# Allegro board fpga_ccd_2.brd
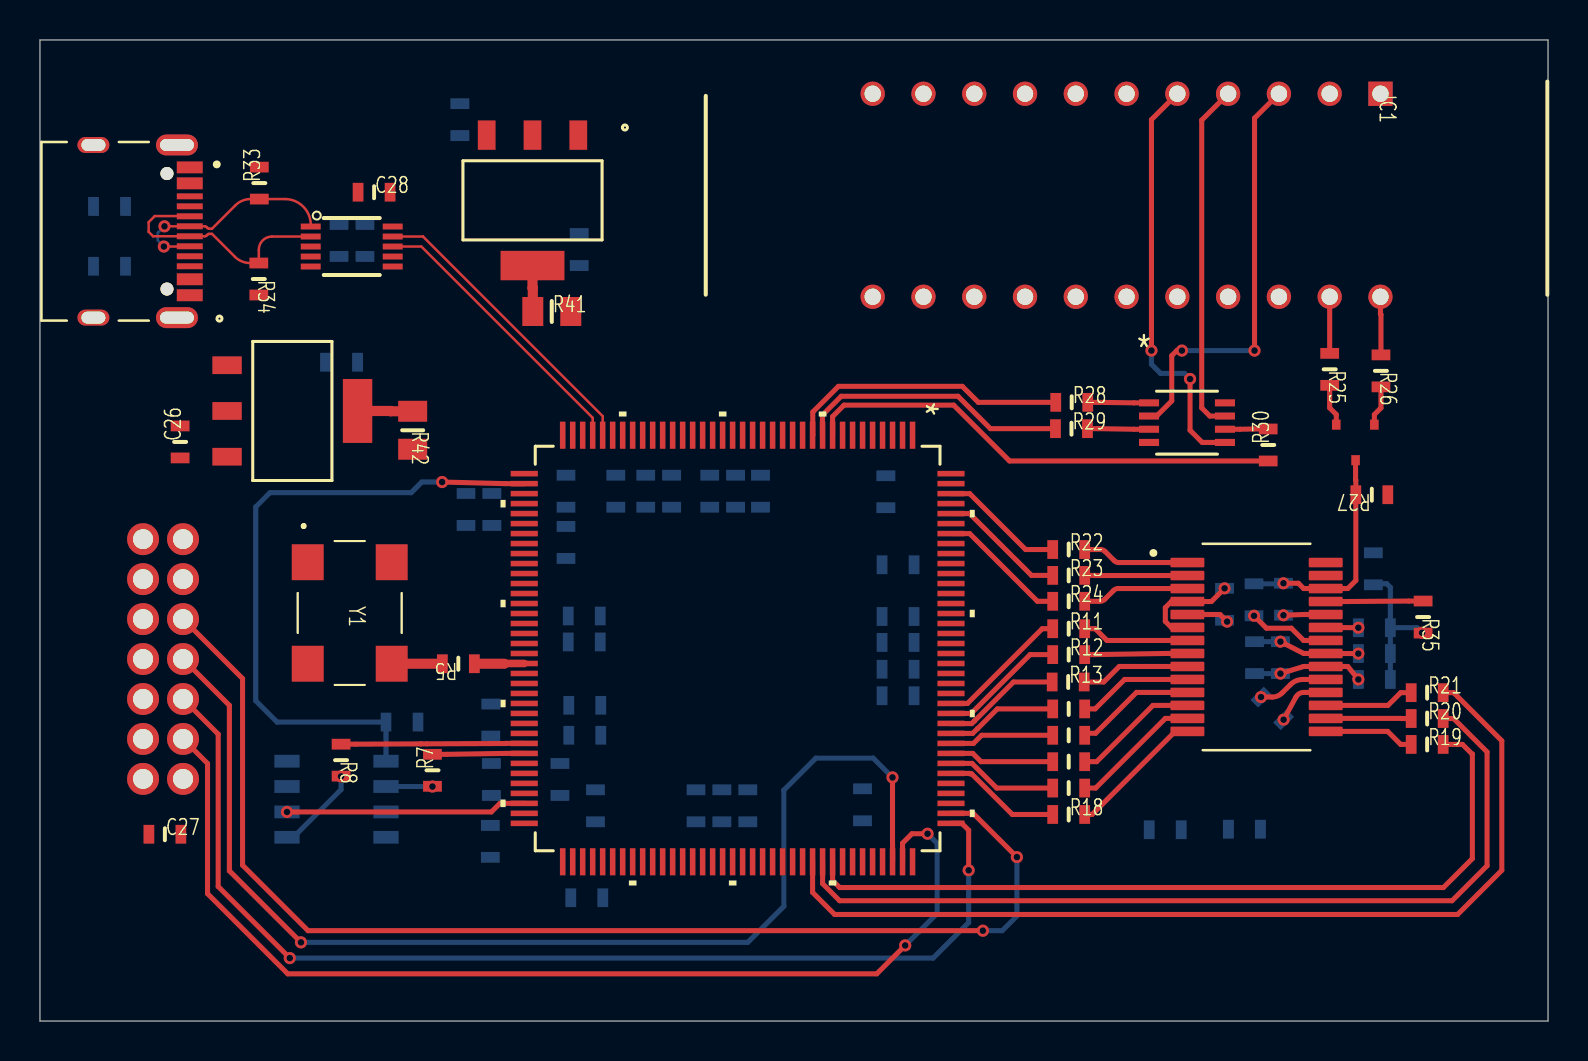
[diagram p0: board, top side]
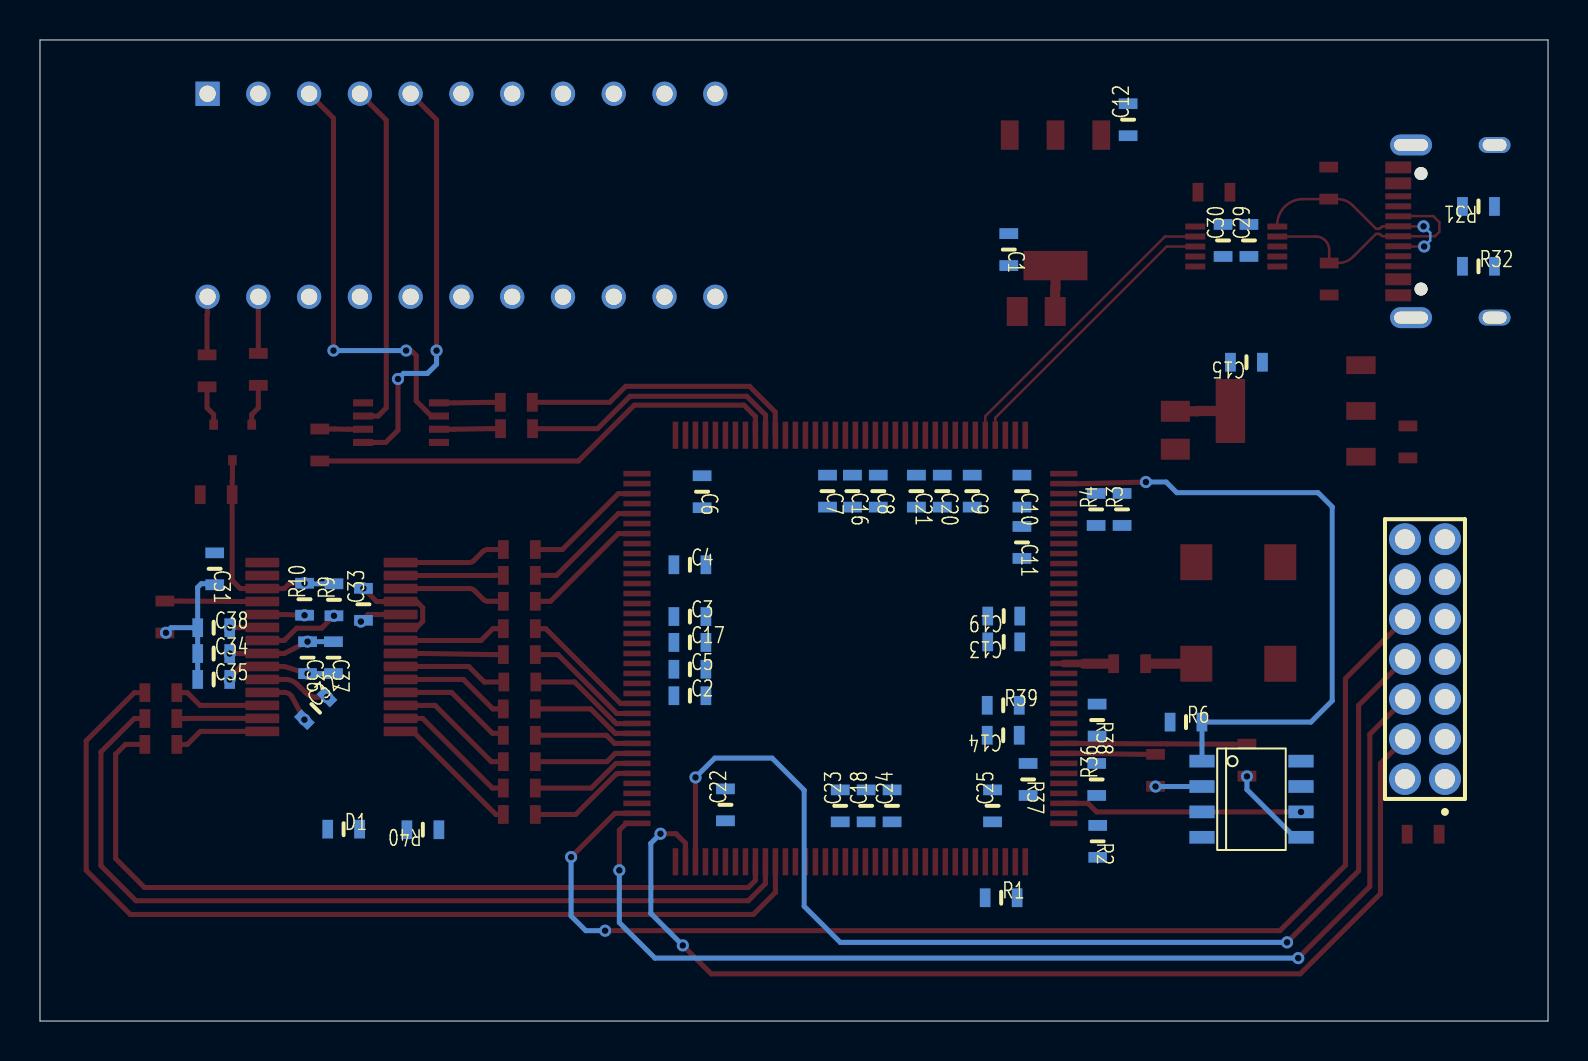
[diagram p1: board, bottom side, seen from below]

Outline 75.44 x 49.1 mm; copper layers: TOP, BOTTOM. Coordinates in mm from the lower left corner of the outline.
Outline path: 0,49.1 0,0 75.44,0 75.44,49.1 0,49.1

## Design rules (mm)
constraint set DEFAULT: min track width 0.127, pair gap 0.127
net group +1.2V: nets +1.2V N30787
net group ADCCLK: nets ADCCLK N43709
net group CCD_ICG: nets CCD_ICG N45930
net group CCD_MASTER: nets CCD_MASTER N46162
net group CCD_SH: nets CCD_SH N46224
net group CDSCLK1: nets CDSCLK1 N43637
net group CDSCLK2: nets CDSCLK2 N43673
net group CLK_50M: nets CLK_50M N10342
net group HT82V38_D0: nets HT82V38_D0 N42823
net group HT82V38_D1: nets HT82V38_D1 N42829
net group HT82V38_D2: nets HT82V38_D2 N42835
net group HT82V38_D3: nets HT82V38_D3 N42817
net group HT82V38_D4: nets HT82V38_D4 N42805
net group HT82V38_D5: nets HT82V38_D5 N42799
net group HT82V38_D6: nets HT82V38_D6 N42811
net group HT82V38_D7: nets HT82V38_D7 N42841
net group N39901: nets N39901 N39920
net group N45186: nets N45080 N45186
net group N103582: nets N103518 N103582
net group SCLK: nets N39538 SCLK
net group SDATA: nets N39540 SDATA
net group SLOAD: nets N39536 SLOAD
net group SPI_FLASH_MISO: nets N10587 SPI_FLASH_MISO
net group SPI_FLASH_MOSI: nets N10677 SPI_FLASH_MOSI
net group USB_D: nets USB_D+ USB_D-
net group CCD_OS: nets CCD_OS N41358 N41362

## Placement (name value [footprint] x y rotation side)
C1  10uF  [0603]  26.97 38.61 270 bottom
C2  10uF  [0603]  42.93 16.28 180 bottom
C3  100nF  [0603]  42.93 20.24 180 bottom
C4  100nF  [0603]  42.93 22.83 180 bottom
C5  100nF  [0603]  42.93 17.6 180 bottom
C6  100nF  [0603]  42.32 26.49 270 bottom
C7  100nF  [0603]  36.04 26.52 270 bottom
C8  100nF  [0603]  33.5 26.52 270 bottom
C9  100nF  [0603]  28.8 26.52 270 bottom
C10  100nF  [0603]  26.31 26.52 270 bottom
C11  100nF  [0603]  26.31 23.95 270 bottom
C12  10uF  [0603]  21.01 45.11 90 bottom
C13  100nF  [0603]  27.23 18.97 0 bottom
C14  100nF  [0603]  27.25 14.3 0 bottom
C15  10uF  [0603]  15.09 32.97 0 bottom
C16  10uF  [0603]  34.8 26.52 270 bottom
C17  100nF  [0603]  42.93 18.95 180 bottom
C18  100nF  [0603]  34.11 10.77 90 bottom
C19  100nF  [0603]  27.23 20.27 0 bottom
C20  100nF  [0603]  30.3 26.52 270 bottom
C21  100nF  [0603]  31.6 26.52 270 bottom
C22  100nF  [0603]  41.15 10.82 90 bottom
C23  100nF  [0603]  35.41 10.77 90 bottom
C24  100nF  [0603]  32.82 10.77 90 bottom
C25  100nF  [0603]  27.79 10.77 90 bottom
C26  10uF  [0603]  7.01 28.98 90 top
C27  100nF  [0603]  6.25 9.35 0 top
C28  100nF  [0603]  16.71 41.48 0 top
C29  10uF  [0603]  14.96 39.07 90 bottom
C30  10uF  [0603]  16.26 39.07 90 bottom
C31  100nF  [0603]  66.7 22.63 270 bottom
C32  100nF  [0603]  61.65 15.65 135 bottom
C33  100nF  [0603]  59.26 20.85 90 bottom
C34  100nF  [0603]  66.75 18.39 180 bottom
C35  100nF  [0603]  66.75 17.09 180 bottom
C36  100nF  [0603]  62.05 18.19 270 bottom
C37  10uF  [0603]  60.76 18.19 270 bottom
C38  100nF  [0603]  66.75 19.69 180 bottom
D1  LED  [0603]  60.25 9.6 180 bottom
IC1  TCD1304DG_8Z_AW_  [DIP1016W62P254L4160H372Q22N]  67.06 46.41 270 top
J1  CONN SOCKET 7x2  [CONN_BULK_HEADER_2X7_2_2]  5.16 12.12 90 bottom
J2  CQ-USB-C16PSMT01  [SHENZHEN-CHUANGQIN-TECHNOLO]  7.49 39.52 270 top
Q1  2SA1015  [SOT23]  65.81 28.96 270 top
R1  4.7K  [0603]  27.36 6.17 180 bottom
R2  4.7K  [0603]  22.53 8.99 270 bottom
R3  4.7K  [0603]  21.31 25.6 90 bottom
R4  4.7K  [0603]  22.61 25.6 90 bottom
R5  33  [0603]  20.93 17.88 180 top
R6  4.7K  [0603]  18.11 14.96 180 bottom
R7  33  [0603]  19.63 12.55 90 top
R8  33  [0603]  15.06 13.06 270 top
R9  NC  [0603]  60.73 21.08 90 bottom
R10  NC  [0603]  62.2 21.11 90 bottom
R11  33R  [0603]  51.46 19.63 0 top
R12  33R  [0603]  51.46 18.34 0 top
R13  33R  [0603]  51.44 16.97 0 top
R14  33R  [0603]  51.46 15.62 0 top
R15  33R  [0603]  51.46 14.3 0 top
R16  33R  [0603]  51.46 12.98 0 top
R17  33R  [0603]  51.46 11.66 0 top
R18  33R  [0603]  51.46 10.34 0 top
R19  33R  [0603]  69.39 13.84 0 top
R20  33R  [0603]  69.39 15.14 0 top
R21  33R  [0603]  69.39 16.43 0 top
R22  33R  [0603]  51.46 23.6 0 top
R23  33R  [0603]  51.46 22.3 0 top
R24  33R  [0603]  51.46 21.01 0 top
R25  150R  [0603]  64.52 32.61 270 top
R26  150R  [0603]  67.08 32.54 270 top
R27  150R  [0603]  66.62 26.34 180 top
R28  33R  [0603]  51.61 30.96 0 top
R29  33R  [0603]  51.6 29.65 0 top
R30  33R  [0603]  61.44 28.83 90 top
R31  5.1K  [0603]  3.48 40.77 0 bottom
R32  5.1K  [0603]  3.48 37.77 180 bottom
R33  45R  [0603]  10.97 41.94 90 top
R34  45R  [0603]  10.95 37.13 270 top
R35  1K  [0603]  69.19 20.22 270 top
R36  0R  [0603]  22.58 12.09 90 bottom
R37  NC  [0603]  26.01 12.09 270 bottom
R38  NC  [0603]  22.56 15.06 270 bottom
R39  1K  [0603]  27.25 15.8 180 bottom
R40  1K  [0603]  56.29 9.58 0 bottom
R41  10R  [0805]  25.6 35.51 0 top
R42  10R  [0805]  18.64 29.57 270 top
U1  XC6SLX9-2TQG144C_A  [TQG144_XIL]  34.9 18.64 270 top
U2  AMS1117-1.2v  [SOT_AMS1117-2P5_AMS]  24.64 41.07 180 top
U3  AMS1117-3.3v  [SOT_AMS1117-2P5_AMS]  12.62 30.53 270 top
U4  M25P16-VMN6TPBA  [SOIC8]  14.83 11.1 180 bottom
U5  CH340E  [MSOP-10]  15.6 38.76 0 top
U6  HT82V38  [SSOP-28]  60.86 18.72 0 top
U7  TC7WH14FU  [SSOP-8]  57.38 29.95 0 top
Y1  50MHz  [SMD7050]  15.49 20.42 270 top

## Library data of the parts
C1-C38 = CAP NP
D1 = LED
IC1 = TCD1304DG_8Z,AW_
J1 = CONN SOCKET 7x2
J2 = USB-C 16pin
Q1 = 2N6520
R1-R5 R7 R8 R36-R39 = RESISTOR
R6 = Res 0603
R9-R35 R40-R42 = R
U1 = XC6SLX9-2TQG144C: User Part Number: PN; Tolerance: TOL
U2 U3 = AMS1117: User Part Number: PN; Tolerance: TOL
U4 = M25P16-VMN6TPBA: Tolerance: ***; User Part Number: ***
U5 = CH340E
U6 = HT82V38
U7 = TC7WH14FU: User Part Number: PN; Tolerance: TOL
Y1 = Oscillator 4p

## Footprints (pads in the part's own frame, mm; a bottom-side part is the same pattern mirrored in y, then rotated)
0603
  rect 0.54x0.94 smd: 1(-0.8,0) 2(0.8,0)
0805
  rect 1.05x1.45 smd: 1(-0.95,0) 2(0.95,0)
CONN_BULK_HEADER_2X7_2_2
  round 1.6 hole 1: 1(0,0) 2(0,2) 3(2,0) 4(2,2) 5(4,0) 6(4,2) 7(6,0) 8(6,2) 9(8,0) 10(8,2) 11(10,0) 12(10,2) 13(12,0) 14(12,2)
DIP1016W62P254L4160H372Q22N
  rect 1.22x1.22 hole 0.82: 1(0,0)
  round 1.22 hole 0.82: 2(0,-2.54) 3(0,-5.08) 4(0,-7.62) 5(0,-10.16) 6(0,-12.7) 7(0,-15.24) 8(0,-17.78) 9(0,-20.32) 10(0,-22.86) 11(0,-25.4) 12(10.16,-25.4) 13(10.16,-22.86) 14(10.16,-20.32) 15(10.16,-17.78) 16(10.16,-15.24) 17(10.16,-12.7) 18(10.16,-10.16) 19(10.16,-7.62) 20(10.16,-5.08) 21(10.16,-2.54) 22(10.16,0)
MSOP-10
  rect 1x0.3 smd: 1(-2.05,1) 2(-2.05,0.5) 3(-2.05,0) 4(-2.05,-0.5) 5(-2.05,-1) 6(2.05,-1) 7(2.05,-0.5) 8(2.05,0) 9(2.05,0.5) 10(2.05,1)
SHENZHEN-CHUANGQIN-TECHNOLO
  round 0.65 hole 0.65 unplated: (-2.89,-1.14) (2.89,-1.14)
  rect 0.6x1.3 smd: A1_B12(-3.2,0) A4_B9(-2.4,0) B1_A12(3.2,0) B4_A9(2.4,0)
  rect 0.3x1.3 smd: A5(-1.25,0) A6(-0.25,0) A7(0.25,0) A8(1.25,0) B5(1.75,0) B6(0.75,0) B7(-0.75,0) B8(-1.75,0)
  oval 1.05x2.1 hole 0.6x1.7: S1(-4.32,-0.64) S2(4.32,-0.64)
  oval 0.8x1.6 hole 0.6x1.2: S3(-4.32,-4.82) S4(4.32,-4.82)
SMD7050
  rect 1.8x1.6 smd: 1(-2.54,-2.1) 2(2.54,-2.1) 3(2.54,2.1) 4(-2.54,2.1)
SOIC8
  rect 1.27x0.635 smd: 1(-2.477,1.905) 2(-2.477,0.635) 3(-2.477,-0.635) 4(-2.477,-1.905) 5(2.477,-1.905) 6(2.477,-0.635) 7(2.477,0.635) 8(2.477,1.905)
SOT23
  rect 0.508x0.432 smd: 1(-0.889,0.94) 2(-0.889,-0.965) 3(0.889,0)
SOT_AMS1117-2P5_AMS
  rect 0.889x1.473 smd: 1(-2.29,-3.264) 2(0,-3.264) 3(2.29,-3.264)
  rect 3.2x1.473 smd: 4(0,3.264)
SSOP-8
  rect 1.003x0.356 smd: 1(-1.899,0.991) 2(-1.899,0.33) 3(-1.899,-0.33) 4(-1.899,-0.991) 5(1.899,-0.991) 6(1.899,-0.33) 7(1.899,0.33) 8(1.899,0.991)
SSOP-28
  custom 1.7x0.48 smd: 1(-3.46,4.225) 2(-3.46,3.575) 3(-3.46,2.925) 4(-3.46,2.275) 5(-3.46,1.625) 6(-3.46,0.975) 7(-3.46,0.325) 8(-3.46,-0.325) 9(-3.46,-0.975) 10(-3.46,-1.625) 11(-3.46,-2.275) 12(-3.46,-2.925) 13(-3.46,-3.575) 14(-3.46,-4.225) 15(3.46,-4.225) 16(3.46,-3.575) 17(3.46,-2.925) 18(3.46,-2.275) 19(3.46,-1.625) 20(3.46,-0.975) 21(3.46,-0.325) 22(3.46,0.325) 23(3.46,0.975) 24(3.46,1.625) 25(3.46,2.275) 26(3.46,2.925) 27(3.46,3.575) 28(3.46,4.225)
TQG144_XIL
  rect 1.359x0.279 smd: 1(-10.674,8.75) 2(-10.674,8.25) 3(-10.674,7.75) 4(-10.674,7.25) 5(-10.674,6.75) 6(-10.674,6.25) 7(-10.674,5.75) 8(-10.674,5.25) 9(-10.674,4.75) 10(-10.674,4.25) 11(-10.674,3.75) 12(-10.674,3.25) 13(-10.674,2.75) 14(-10.674,2.25) 15(-10.674,1.75) 16(-10.674,1.25) 17(-10.674,0.75) 18(-10.674,0.25) 19(-10.674,-0.25) 20(-10.674,-0.75) 21(-10.674,-1.25) 22(-10.674,-1.75) 23(-10.674,-2.25) 24(-10.674,-2.75) 25(-10.674,-3.25) 26(-10.674,-3.75) 27(-10.674,-4.25) 28(-10.674,-4.75) 29(-10.674,-5.25) 30(-10.674,-5.75) 31(-10.674,-6.25) 32(-10.674,-6.75) 33(-10.674,-7.25) 34(-10.674,-7.75) 35(-10.674,-8.25) 36(-10.674,-8.75) 73(10.674,-8.75) 74(10.674,-8.25) 75(10.674,-7.75) 76(10.674,-7.25) 77(10.674,-6.75) 78(10.674,-6.25) 79(10.674,-5.75) 80(10.674,-5.25) 81(10.674,-4.75) 82(10.674,-4.25) 83(10.674,-3.75) 84(10.674,-3.25) 85(10.674,-2.75) 86(10.674,-2.25) 87(10.674,-1.75) 88(10.674,-1.25) 89(10.674,-0.75) 90(10.674,-0.25) 91(10.674,0.25) 92(10.674,0.75) 93(10.674,1.25) 94(10.674,1.75) 95(10.674,2.25) 96(10.674,2.75) 97(10.674,3.25) 98(10.674,3.75) 99(10.674,4.25) 100(10.674,4.75) 101(10.674,5.25) 102(10.674,5.75) 103(10.674,6.25) 104(10.674,6.75) 105(10.674,7.25) 106(10.674,7.75) 107(10.674,8.25) 108(10.674,8.75)
  rect 0.279x1.359 smd: 37(-8.75,-10.674) 38(-8.25,-10.674) 39(-7.75,-10.674) 40(-7.25,-10.674) 41(-6.75,-10.674) 42(-6.25,-10.674) 43(-5.75,-10.674) 44(-5.25,-10.674) 45(-4.75,-10.674) 46(-4.25,-10.674) 47(-3.75,-10.674) 48(-3.25,-10.674) 49(-2.75,-10.674) 50(-2.25,-10.674) 51(-1.75,-10.674) 52(-1.25,-10.674) 53(-0.75,-10.674) 54(-0.25,-10.674) 55(0.25,-10.674) 56(0.75,-10.674) 57(1.25,-10.674) 58(1.75,-10.674) 59(2.25,-10.674) 60(2.75,-10.674) 61(3.25,-10.674) 62(3.75,-10.674) 63(4.25,-10.674) 64(4.75,-10.674) 65(5.25,-10.674) 66(5.75,-10.674) 67(6.25,-10.674) 68(6.75,-10.674) 69(7.25,-10.674) 70(7.75,-10.674) 71(8.25,-10.674) 72(8.75,-10.674) 109(8.75,10.674) 110(8.25,10.674) 111(7.75,10.674) 112(7.25,10.674) 113(6.75,10.674) 114(6.25,10.674) 115(5.75,10.674) 116(5.25,10.674) 117(4.75,10.674) 118(4.25,10.674) 119(3.75,10.674) 120(3.25,10.674) 121(2.75,10.674) 122(2.25,10.674) 123(1.75,10.674) 124(1.25,10.674) 125(0.75,10.674) 126(0.25,10.674) 127(-0.25,10.674) 128(-0.75,10.674) 129(-1.25,10.674) 130(-1.75,10.674) 131(-2.25,10.674) 132(-2.75,10.674) 133(-3.25,10.674) 134(-3.75,10.674) 135(-4.25,10.674) 136(-4.75,10.674) 137(-5.25,10.674) 138(-5.75,10.674) 139(-6.25,10.674) 140(-6.75,10.674) 141(-7.25,10.674) 142(-7.75,10.674) 143(-8.25,10.674) 144(-8.75,10.674)

## Nets
+1.2V: C16.1 C17.1 C18.1 C19.1 C20.1 C21.1 R41.2 U1.19 U1.28 U1.52 U1.89 U1.128
+3.3V: C2.1 C3.1 C4.1 C5.1 C6.1 C7.1 C8.1 C9.1 C10.1 C11.1 C13.1 C14.1 C22.1 C23.1 C24.1 C25.1 C27.2 C31.1 C32.1 C33.1 IC1.1(\VDD\) IC1.2 J1.2 R2.2 R3.1 R4.1 R6.1 R27.1 R36.2 R38.2 R42.2 U1.4 U1.18 U1.20 U1.31 U1.36 U1.42 U1.53 U1.63 U1.76 U1.86 U1.90 U1.103(\VCCO_1_2\) U1.122 U1.125 U1.129 U1.135 U4.3(\W-\) U4.7 U4.8 U6.5 U6.18 U6.28 U7.8(\VCC\) Y1.4(\VCC\)
+5V: C12.1 C26.1 C29.1 C30.1 J2.A4_B9 J2.B4_A9(\VBUS#B4_A9\) U2.3 U3.3 U5.7(\VCC\)
GND: C1.1 C2.2 C3.2 C4.2 C5.2 C6.2 C7.2 C8.2 C9.2 C10.2 C11.2 C12.2 C13.2 C14.2 C15.1 C16.2 C17.2 C18.2 C19.2 C20.2 C21.2 C22.2 C23.2 C24.2 C25.2 C26.2 C27.1 C28.1 C29.2 C30.2 C31.2 C32.2 C33.2 C34.1 C35.1 C38.1 D1.1(\CATHODE\) IC1.6 IC1.7 IC1.8 IC1.9 IC1.10 IC1.11 IC1.12 IC1.13 IC1.14 IC1.15 IC1.16 IC1.17 IC1.18 IC1.19 IC1.20 IC1.22 J1.1 J1.3 J1.5 J1.7 J1.9 J1.11 J1.13 J2.A1_B12 J2.B1_A12 J2.S1 J2.S2 J2.S3 J2.S4 R1.1 R26.1 R31.1 R32.2 R33.2 R34.2 R35.2 R37.1 R39.1 U1.3 U1.13 U1.25 U1.49 U1.54 U1.68 U1.77 U1.91 U1.96 U1.108 U1.113 U1.130 U1.136 U2.1 U3.1 U4.4 U5.3 U6.4 U6.6 U6.19 U6.27 U7.4 Y1.2
ADCCLK: R24.1 U1.138
CCD_ICG: R30.1 U1.9
CCD_MASTER: R28.1 U1.11
CCD_OS: Q1.3 R9.2 R10.2 R27.2 U6.26(\VINR\)
CCD_SH: R29.1 U1.10
CDSCLK1: R22.1 U1.142
CDSCLK2: R23.1 U1.140
CLK_50M: R5.1 U1.56
HT82V38_D0: R18.1 U1.114
HT82V38_D1: R17.1 U1.115
HT82V38_D2: R16.1 U1.116
HT82V38_D3: R15.1 U1.117
HT82V38_D4: R14.1 U1.118
HT82V38_D5: R13.1 U1.119
HT82V38_D6: R12.1 U1.120
HT82V38_D7: R11.1 U1.121
M0: R36.1 R37.2 U1.69
M1: R38.1 R39.2 U1.60
SCLK: R20.2 U1.99
SDATA: R19.2 U1.100
SLOAD: R21.2 U1.98
SPI_FLASH_CLK: U1.70 U4.6
SPI_FLASH_CSO: R6.2 U1.38 U4.1
SPI_FLASH_MISO: R7.2 U1.65
SPI_FLASH_MOSI: R8.1 U1.64
TCK_F: J1.6 U1.109
TDI_F: J1.10 U1.110
TDO_F: J1.8 U1.106
TMS_F: J1.4(9) U1.107
UART_RXD: U1.33 U5.8
UART_TXD: U1.32 U5.9
USB_D+: J2.A6 J2.B6 R33.1 U5.1
USB_D-: J2.A7 J2.B7 R34.1 U5.2
N00968: R4.2 U1.39
N10342: R5.2 Y1.3
N10587: R7.1 U4.2
N10677: R8.2 U4.5
N14884: R3.2 U1.37
N15354: R1.2 U1.73
N15645: R2.1 U1.72
N29928: C28.2 U5.10
N30787: C1.2 R41.1 U2.2 U2.4(\VOUT\)
N30939: C15.2 R42.1 U3.2 U3.4(\VOUT\)
N39536: R21.1 U6.17
N39538: R20.1 U6.16
N39540: R19.1 U6.15
N39901: C35.2 C36.2 C37.2 U6.20
N39920: C34.2 C36.1 C37.1 U6.21
N40100: C38.2 U6.23
N41358: R10.1 U6.24
N41362: R9.1 U6.22
N41426: R35.1 U6.25
N42799: R13.2 U6.9
N42805: R14.2 U6.10
N42811: R12.2 U6.8
N42817: R15.2 U6.11
N42823: R18.2 U6.14
N42829: R17.2 U6.13
N42835: R16.2 U6.12
N42841: R11.2 U6.7
N43637: R22.2 U6.1
N43673: R23.2 U6.2
N43709: R24.2 U6.3
N45080: IC1.21 R25.1
N45186: Q1.2 R25.2
N45216: Q1.1(\EMITTER\) R26.2
N45901: IC1.5 U7.5
N45905: IC1.3 U7.2
N45930: R30.2 U7.6
N46162: R28.2 U7.1
N46224: R29.2 U7.3
N46412: IC1.4 U7.7
N48976: J2.B5 R32.1
N49298: J2.A5 R31.2
N49459: J2.A8 J2.B8
N103518: R40.1 U1.143
N103582: D1.2 R40.2

Pads without a net: J1 12 14; U1 1 2 5 6 7 8 12 14 15 16 17 21 22 23 24 26 27 29 30 34 35 40 41 43 44 45 46 47 48 50 51 55 57 58 59 61 62 66 67 71 74 75 78 79 80 81 82 83 84 85 87 88 92 93 94 95 97 101 102 104 105 111 112 123 124 126 127 131 132 133 134 137 139 141 144; U5 4 5 6; Y1 1

## Via types
v1: diameter 0.61, hole 0.33, TOP to BOTTOM, 31 vias

## Routing (per net, layer and track width the routed paths; a pad name or vN(x,y) marks a point on that pad's centre or on a via; arc(x,y) is an arc through that point)
+3.3V: length 5
  TOP w0.254: U6.18 63.21,16.44 arc(62.99,16.38) 62.83,16.22 v1(62.21,15.08) ; v1(59.39,19.99) 59.03,20.34 U6.5
GND: length 19
  TOP w0.254: U6.6 56.6,19.69 56.29,20 56.29,20.69 56.6,20.99 U6.4 58.6,20.99 v1(59.26,21.65) ; U6.19 63.17,17.09 arc(62.84,17.03) 62.56,16.84 62.13,16.41 arc(61.9,16.26) 61.64,16.21 v1(61.08,16.21) ; R26.1 67.08,35.36 67.06,35.38 IC1.22
  BOTTOM w0.254: C38.1 67.55,21.7 67.37,21.88 66.75,21.88 C31.2 ; C38.1 C34.1 C35.1 ; C38.1 68.88,19.69 v1(69.14,19.43)
ADCCLK: length 6.5
  TOP w0.254: U1.138 46.51,24.39 49.9,21.01 R24.1
CCD_ICG: length 24.1
  TOP w0.254: R30.1 48.5,28.03 45.71,30.82 40.22,30.82 39.65,30.25 U1.9
CCD_MASTER: length 14.2
  TOP w0.254: U1.11 38.66,29.33 38.66,30.48 39.94,31.76 46.14,31.76 46.94,30.96 R28.1
CCD_OS: length 11.4
  TOP w0.254: Q1.3 65.81,27.08 65.82,27.06 R27.2 65.82,22.05 65.42,21.64 U6.26 63.21,21.64 62.95,21.91 v1(62.2,21.91)
  BOTTOM w0.254: v1(62.2,21.91) 62.18,21.88 R9.2
CCD_SH: length 13.7
  TOP w0.254: R29.1 47.54,29.65 45.92,31.27 40.08,31.27 39.14,30.33 39.14,29.33 U1.10
CDSCLK1: length 6.2
  TOP w0.254: U1.142 46.51,26.39 49.3,23.6 R22.1
CDSCLK2: length 6.4
  TOP w0.254: U1.140 46.51,25.39 49.6,22.3 R23.1
CLK_50M: length 2.5
  TOP w0.381: U1.56 23.23,17.89 23.23,17.88
  TOP w0.508: 23.23,17.88 R5.1
HT82V38_D0: length 5.9
  TOP w0.254: R18.1 48.64,10.34 46.61,12.37 46.53,12.37 46.51,12.39 U1.114
HT82V38_D1: length 5.6
  TOP w0.254: U1.115 46.62,12.89 47.86,11.66 R17.1
HT82V38_D2: length 5.3
  TOP w0.254: U1.116 46.66,13.39 47.08,12.98 R16.1
HT82V38_D3: length 5.3
  TOP w0.254: U1.117 46.7,13.89 47.1,14.3 R15.1
HT82V38_D4: length 5.6
  TOP w0.254: R14.1 47.89,15.62 46.9,14.63 46.89,14.63 46.66,14.39 U1.118
HT82V38_D5: length 5.9
  TOP w0.254: R13.1 48.7,16.97 46.74,15.01 46.74,15.01 46.61,14.88 45.58,14.88 U1.119
HT82V38_D6: length 6.3
  TOP w0.254: U1.120 45.58,15.39 46.58,15.39 49.53,18.34 R12.1
HT82V38_D7: length 6.6
  TOP w0.254: R11.1 50.14,19.63 46.4,15.89 U1.121
SCLK: length 44
  TOP w0.254: R20.2 70.72,15.14 72.39,13.47 72.39,7.77 70.64,6.02 40,6.02 39.15,6.88 U1.99
SDATA: length 40.6
  TOP w0.254: U1.100 39.65,7.04 40.01,6.68 70.21,6.68 71.65,8.13 71.65,13.36 71.64,13.36 71.16,13.84 R19.2
SLOAD: length 47.8
  TOP w0.254: U1.98 38.65,6.44 39.75,5.33 70.92,5.33 73.13,7.54 73.13,14.02 70.72,16.43 R21.2
SPI_FLASH_CLK: length 12
  TOP w0.254: U1.70 23.07,10.89 23.06,10.9 23.01,10.9 22.58,10.46 v1(12.36,10.46)
SPI_FLASH_CSO: length 32.6
  TOP w0.254: v1(20.12,26.97) 23.29,26.89 U1.38
  BOTTOM w0.254: U4.1 R6.2 11.86,14.96 10.79,16.03 10.79,25.73 11.51,26.44 18.57,26.44 19.1,26.97 v1(20.12,26.97)
SPI_FLASH_MISO: length 4.6
  TOP w0.254: U1.65 23.29,13.39 20.36,13.35 R7.2
SPI_FLASH_MOSI: length 9.2
  TOP w0.254: U1.64 23.29,13.89 23.29,13.89 19.35,13.87 19.06,13.87 19.06,13.87 15.79,13.86 R8.1
TCK_F: length 55.5
  TOP w0.254: J1.6 8.92,14.36 8.92,6.73 v1(12.5,3.15) ; U1.109 46.11,9.89 46.46,9.55 v1(46.46,7.54)
  BOTTOM w0.254: v1(46.46,7.54) 46.46,4.93 44.68,3.15 v1(12.5,3.15)
TDI_F: length 61.1
  TOP w0.254: v1(48.87,8.2) 46.68,10.39 U1.110 ; v1(47.17,4.52) 13.41,4.52 10.13,7.8 10.13,17.14 J1.10
  BOTTOM w0.254: v1(48.87,8.2) 48.87,5.26 48.13,4.52 v1(47.17,4.52)
TDO_F: length 58.1
  TOP w0.254: J1.8 9.47,15.8 9.47,7.52 v1(13.06,3.94) ; v1(42.65,12.19) 42.65,8.91 42.65,8.9 U1.106
  BOTTOM w0.254: v1(42.65,12.19) 41.68,13.16 38.81,13.16 37.21,11.56 37.21,5.74 35.41,3.94 v1(13.06,3.94)
TMS_F: length 54.2
  TOP w0.254: J1.4 8.38,12.89 8.38,6.38 12.4,2.36 41.86,2.36 v1(43.28,3.78) ; v1(44.4,9.37) 43.62,9.37 43.15,8.9 U1.107
  BOTTOM w0.254: v1(44.4,9.37) 44.88,8.89 44.88,5.38 v1(43.28,3.78)
UART_RXD: length 14.4
  TOP w0.127: U1.33 27.65,30.19 19.08,38.76 U5.8
UART_TXD: length 15.2
  TOP w0.127: U5.9 19.16,39.26 19.16,39.26 28.15,30.27 U1.32
USB_D+: length 11.3
  TOP w0.127: U5.1 13.55,39.85 arc(13.17,40.76) 12.26,41.14 R33.1 10.53,41.14 arc(10.12,41.05) 9.78,40.82 8.6,39.65 8.47,39.65 arc(8.42,39.66) 8.38,39.69 8.33,39.74 arc(8.29,39.76) 8.24,39.77 J2.A6 v1(6.23,39.77) ; J2.B6 7.48,38.76 v1(6.2,38.76)
  BOTTOM w0.127: v1(6.23,39.77) 6.22,39.77 5.89,39.45 5.89,39.07 v1(6.2,38.76)
USB_D-: length 12.5
  TOP w0.127: R34.1 10.51,37.93 arc(10.1,38.02) 9.75,38.25 8.6,39.4 8.47,39.4 arc(8.42,39.39) 8.38,39.36 8.33,39.31 arc(8.29,39.28) 8.24,39.27 J2.A7 5.66,39.27 5.44,39.5 5.44,39.98 5.74,40.28 7.48,40.28 J2.B7 ; R34.1 10.97,37.93 ; R34.1 10.95,38.6 arc(11.14,39.07) 11.61,39.26 U5.2
N10342: length 2.5
  TOP w0.508: Y1.3 R5.2
N10587: length 2.3
  BOTTOM w0.254: U4.2 v1(19.63,11.73)
N10677: length 4.4
  BOTTOM w0.254: U4.5 12.67,9.19 15.06,11.58 v1(15.06,12.24)
N30787: length 2.3
  TOP w0.508: R41.1 24.65,36.69 24.64,36.69 U2.4
N30939: length 2.8
  TOP w0.508: R42.1 17.54,30.52 17.54,30.53 U3.4
N39536: length 4.5
  TOP w0.254: R21.1 68.07,16.43 67.43,15.79 U6.17
N39538: length 4.3
  TOP w0.254: U6.16 68.06,15.14 68.07,15.14 R20.1
N39540: length 4.5
  TOP w0.254: U6.15 67.42,14.49 68.07,13.84 R19.1
N39901: length 5.6
  TOP w0.254: v1(62.05,17.39) 63.21,17.74 U6.20 65.42,17.74 v1(65.95,17.09)
  BOTTOM w0.254: C37.2 v1(62.05,17.39)
N39920: length 5.3
  TOP w0.254: v1(65.95,18.39) U6.21 63.21,18.39 v1(62.05,18.99)
  BOTTOM w0.254: C37.1 v1(62.05,18.99)
N40100: length 1.6
  TOP w0.254: v1(65.95,19.69) U6.23
N41358: length 2.1
  TOP w0.254: U6.24 63.21,20.34 v1(62.2,20.31)
N41362: length 4.1
  TOP w0.254: U6.22 63.21,19.04 62.6,19.66 61.35,19.66 v1(60.73,20.28) 60.72,20.28
N41426: length 4.9
  TOP w0.254: R35.1 68.47,21.02 65.42,20.99 U6.25
N42799: length 5.5
  TOP w0.254: U6.9 53.99,17.74 53.21,16.97 R13.2
N42805: length 5.7
  TOP w0.254: R14.2 52.78,15.62 54.26,17.09 U6.10
N42811: length 5.1
  TOP w0.254: R12.2 52.78,18.34 56.29,18.39 U6.8
N42817: length 6
  TOP w0.254: U6.11 54.85,16.44 52.81,14.4 52.36,14.4 R15.2
N42823: length 6.9
  TOP w0.254: U6.14 56.79,14.49 52.63,10.34 R18.2
N42829: length 6.6
  TOP w0.254: R17.2 52.81,11.66 56.29,15.14 U6.13
N42835: length 6.3
  TOP w0.254: U6.12 55.67,15.79 52.86,12.98 R16.2
N42841: length 5.4
  TOP w0.254: R11.2 52.78,19.63 53.37,19.04 U6.7
N43637: length 5.4
  TOP w0.254: R22.2 53.05,23.6 arc(53.17,23.57) 53.28,23.5 53.74,23.04 arc(53.84,22.97) 53.97,22.94 U6.1
N43673: length 5.1
  TOP w0.254: R23.2 52.78,22.3 52.79,22.29 U6.2
N43709: length 5.4
  TOP w0.254: U6.3 53.94,21.64 arc(53.81,21.62) 53.71,21.55 53.26,21.1 arc(53.15,21.03) 53.03,21.01 R24.2
N45080: length 2.8
  TOP w0.254: IC1.21 R25.1
N45186: length 2.1
  TOP w0.254: Q1.2 64.85,30.35 64.52,30.68 R25.2
N45216: length 2
  TOP w0.254: R26.2 67.08,30.68 66.75,30.35 Q1.1
N45901: length 20.9
  TOP w0.254: v1(55.6,33.55) 55.6,45.11 IC1.5 ; v1(57.53,32.13) 57.53,29.57 58.14,28.96 U7.5
  BOTTOM w0.254: v1(57.53,32.13) 57.25,32.41 56.06,32.41 55.6,32.87 v1(55.6,33.55)
N45905: length 21.3
  TOP w0.254: U7.2 55.86,30.28 56.62,31.03 56.62,33.3 56.87,33.55 v1(57.12,33.55) ; IC1.3 60.76,45.19 v1(60.76,33.55)
  BOTTOM w0.254: v1(60.76,33.55) v1(57.12,33.55)
N45930: length 2.2
  TOP w0.254: U7.6 60.03,29.62 60.72,29.63 R30.2
N46162: length 3.1
  TOP w0.254: U7.1 54.72,30.94 52.94,30.96 R28.2
N46224: length 3.1
  TOP w0.254: R29.2 52.92,29.65 54.72,29.62 U7.3
N46412: length 17.6
  TOP w0.254: IC1.4 58.12,45.09 58.12,30.68 58.52,30.28 U7.7
